# Altium PCB P01-LEDS.PcbDoc (part 1 of 2)
Units mm, origin at the board's own origin, x right, y up, seen from the top; angles counter-clockwise.
Board outline 51.05 x 97.12 mm, 4 copper layers (Top Layer, Mid Layer 1, Mid Layer 2, Bottom Layer), stack 1.57 mm thick; 35 components, 34 nets, 169 pads, 53 vias.
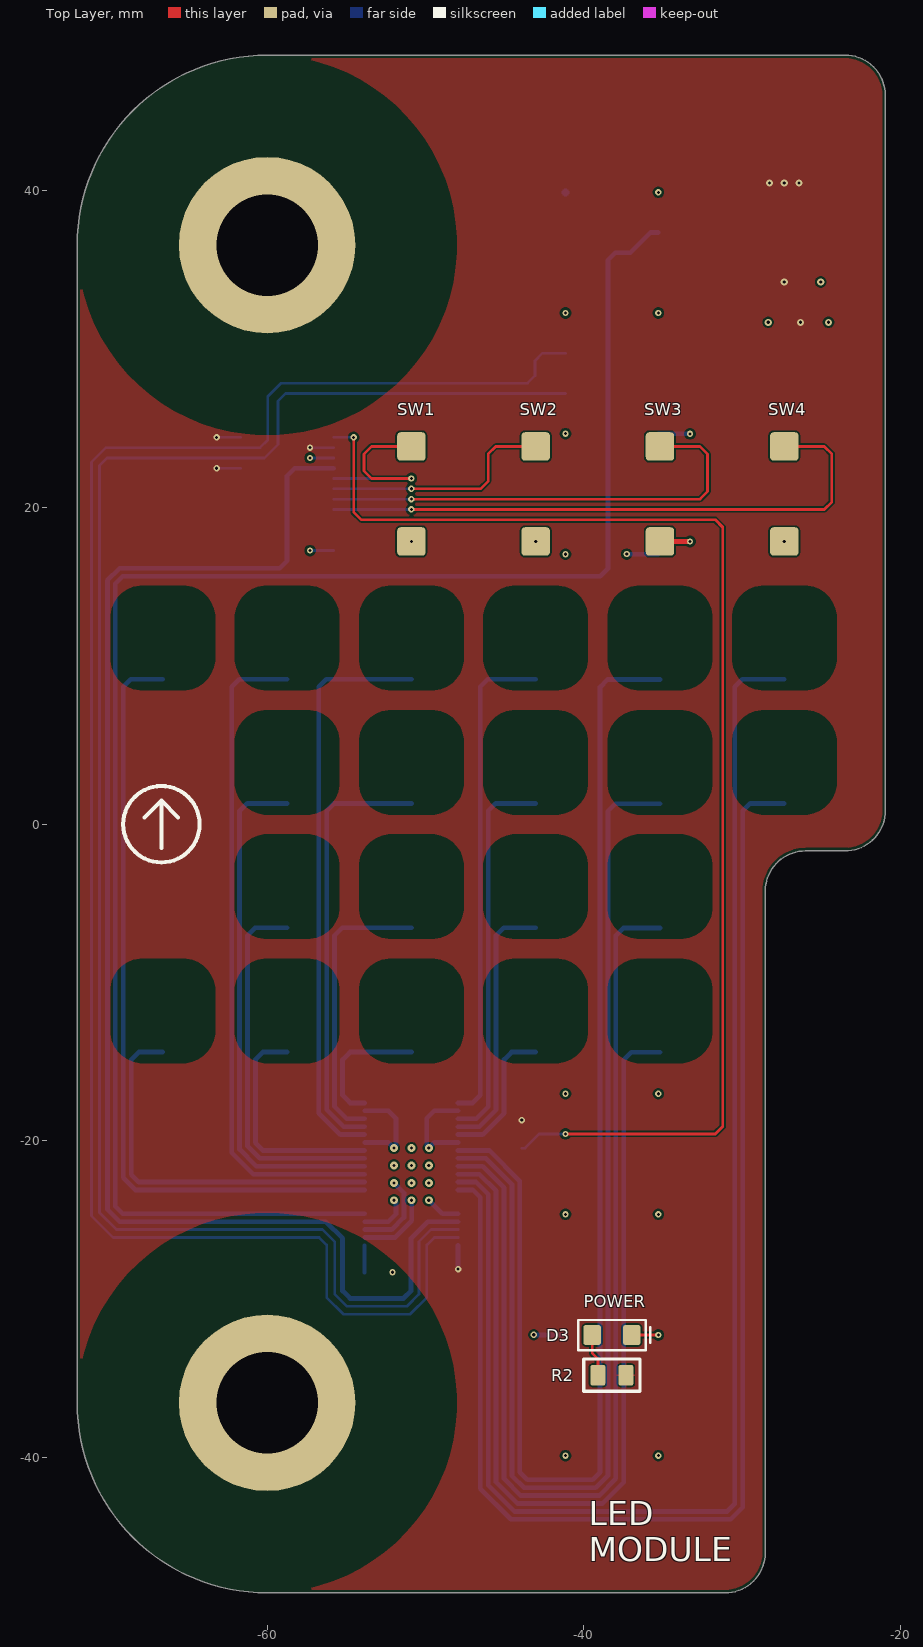
[diagram p0: Top Layer view]
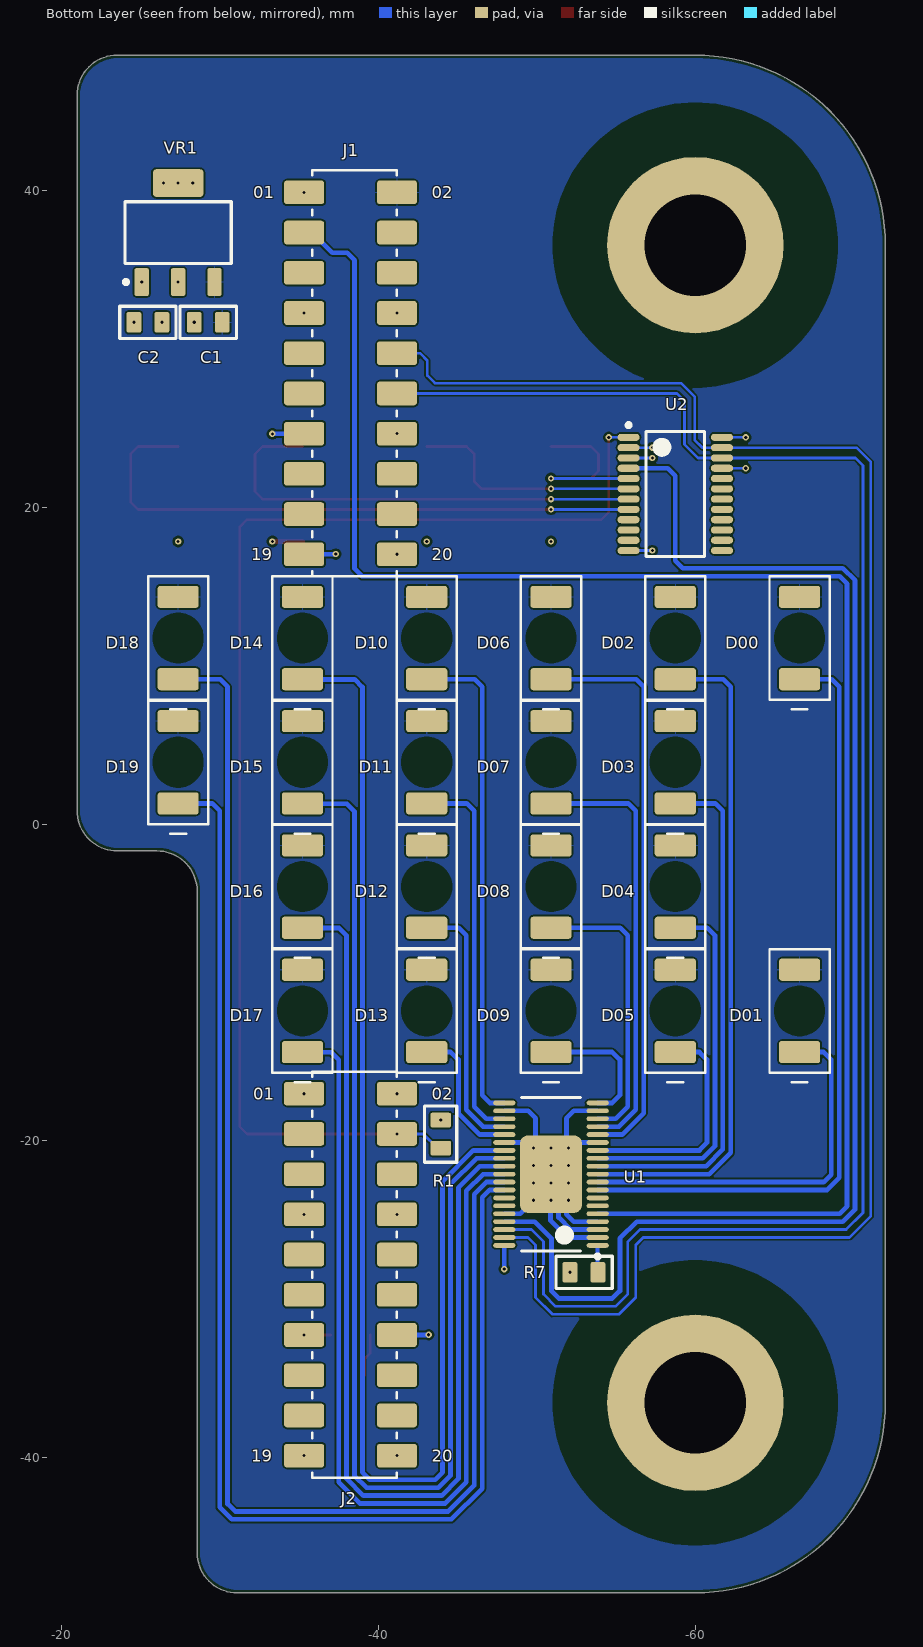
[diagram p1: Bottom Layer view, seen from below]
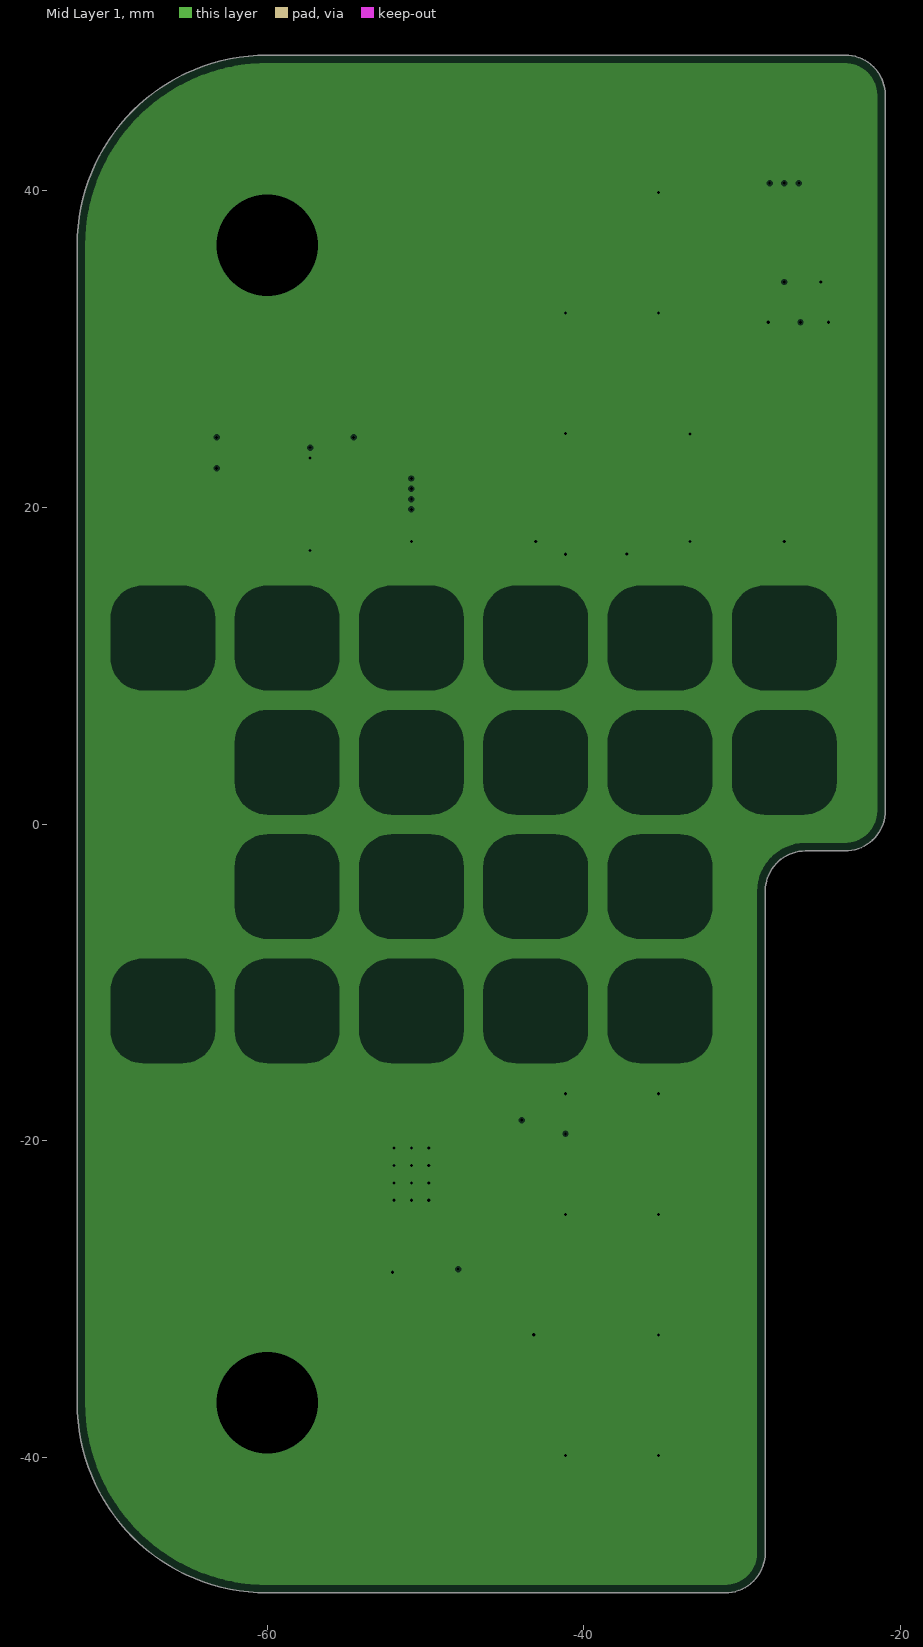
[diagram p2: Mid Layer 1, clearances drawn from the general rule]
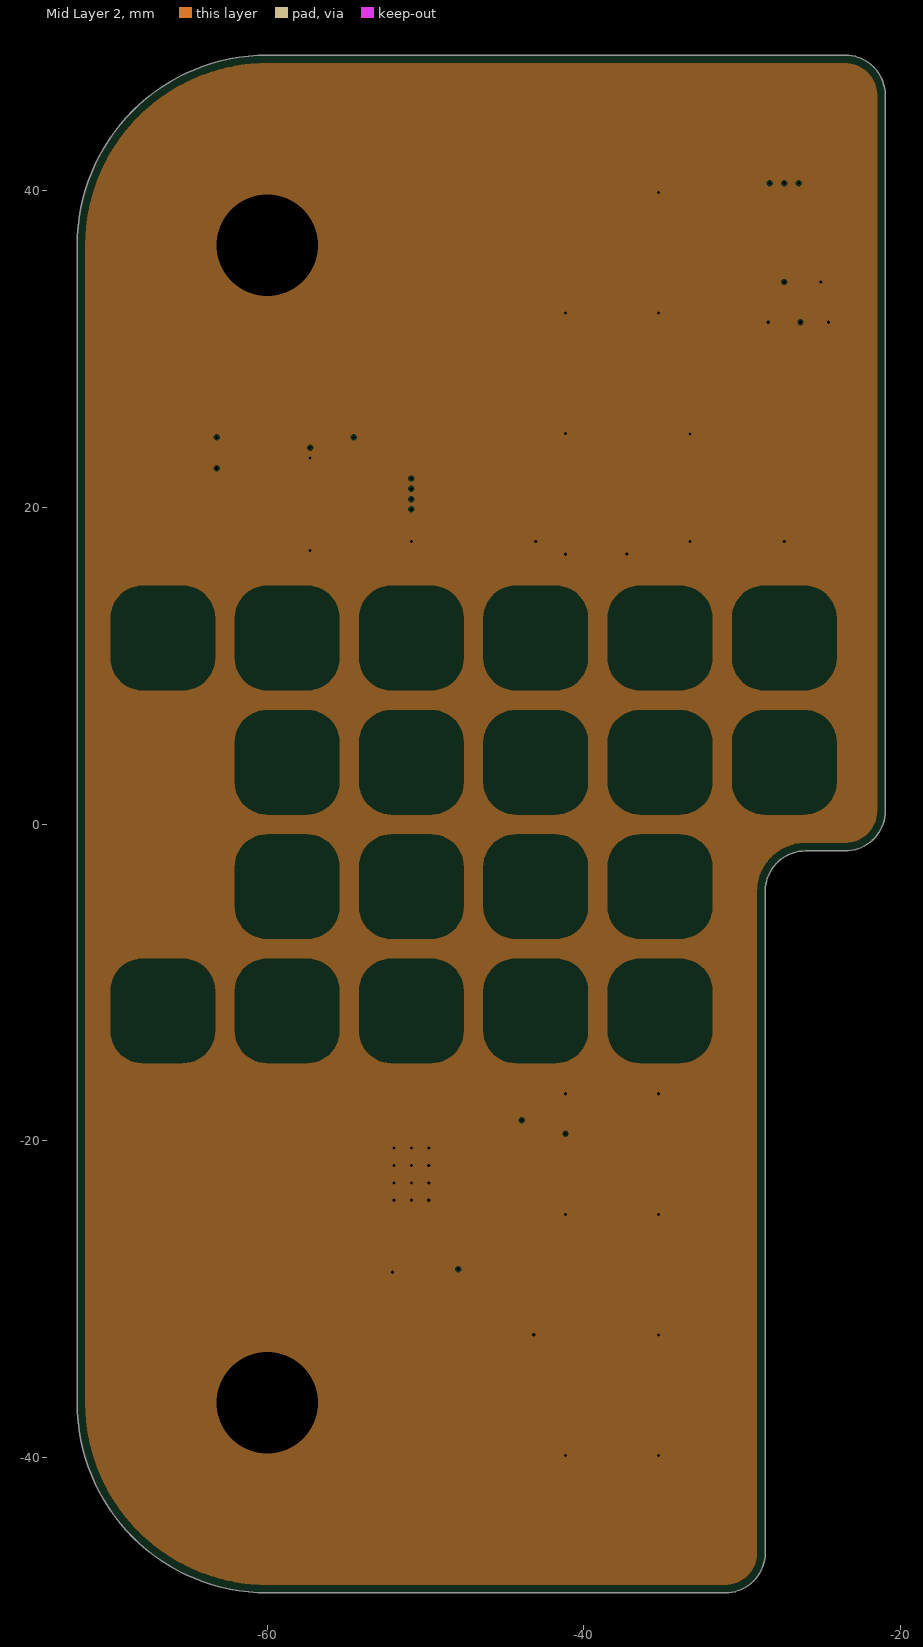
[diagram p3: Mid Layer 2, clearances drawn from the general rule]
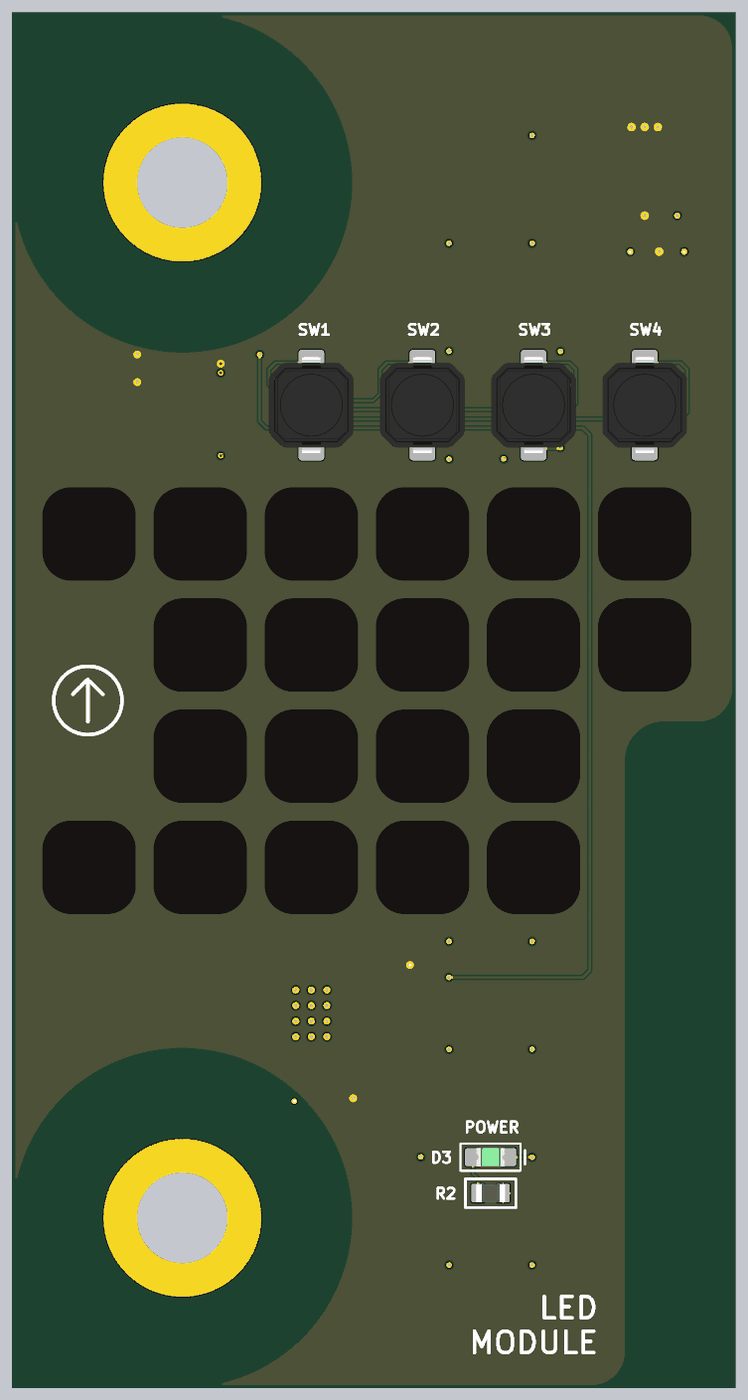
[diagram p4: 3D render of the assembled board from above, using the file's embedded part models]
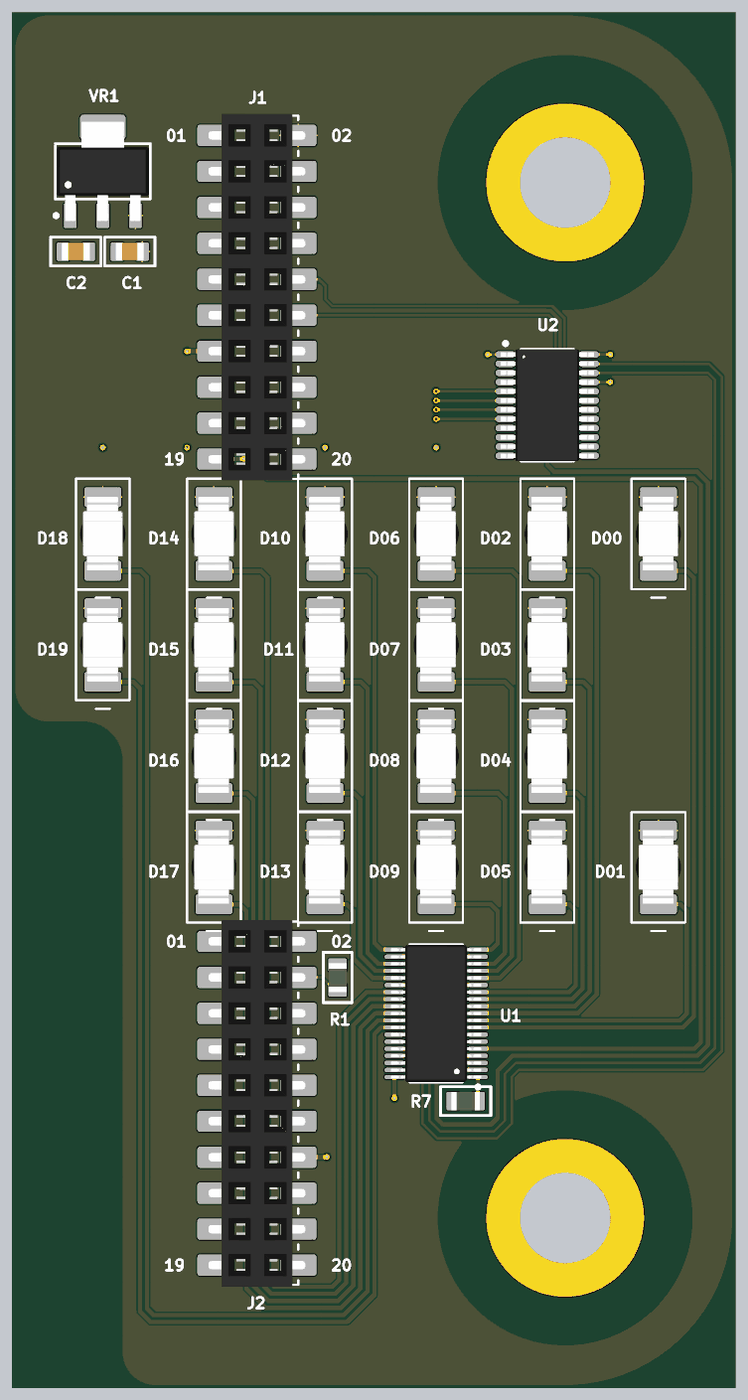
[diagram p5: 3D render of the assembled board from below, using the file's embedded part models]

## Layer stack, top to bottom
Top Solder: solder mask 0.0127, Solder Resist, Dk 3.8
Top Layer: signal copper 0.035
Dielectric 1: prepreg 0.1, 2313, Dk 4.05
Mid Layer 1: plane copper 0.0175, net GND
Core: core 1.265, FR-4, Dk 4.5
Mid Layer 2: plane copper 0.0175, net GND
Dielectric 2: prepreg 0.1, 2313, Dk 4.05
Bottom Layer: signal copper 0.035
Bottom Solder: solder mask 0.0127, Solder Resist, Dk 3.8

## Board outline
-72,-36.561 ccw(c-60,-36.561) -60,-48.562 -31.076,-48.561 ccw(c-31.076,-46.021) -28.536,-46.021 -28.536,-4.238 cw(c-25.996,-4.238) -25.996,-1.699 -23.495,-1.698 ccw(c-23.495,0.841) -20.955,0.841 -20.955,46.022 ccw(c-23.495,46.021) -23.495,48.562 -60,48.562 ccw(c-60,36.562) -72,36.561

## Design rules (kind name [scope] priority, off if disabled: settings)
BoardOutlineClearance [All] p1: gap=0.2 ignorepadtopadclearanceinfootprint=FALSE
Clearance [All] p1: gap=0.102 ignorepadtopadclearanceinfootprint=FALSE except(0.127: Arc-Via Track-Via SMDPad-Via THPad-Via Via-Via Via-Fill Via-Poly Via-Region Via-Text; 0.25: Arc-Hole Track-Hole SMDPad-Hole THPad-Hole Via-Hole Fill-Hole Poly-Hole Region-Hole Text-Hole)
ComponentClearance [All] p1: gap=0.102 collisioncheckmode=3 verticalgap=0.102 showdistances=TRUE
DiffPairsRouting [All] p1: maxlimit=0.102 minlimit=0.102 mostfreqgap=0.102 toplayer_minwidth=0.102 toplayer_maxwidth=1816.048 toplayer_prefwidth=0.102 bottomlayer_minwidth=0.102 bottomlayer_maxwidth=1816.048 bottomlayer_prefwidth=0.102 maxuncoupledlength=12.7
Height [All] p1: minheight=0 maxheight=1816.048 prefheight=12.7
HoleSize [All] p1: absolutevalues=TRUE maxlimit=6.3 minlimit=0.2 maxpercent=80.000 minpercent=20.000
HoleToHoleClearance [All] p1: gap=0.25 allowstackedmicrovias=FALSE
MinimumAnnularRing [All] p1: minimumring=0.076
MinimumSolderMaskSliver [All] p1: minsoldermaskwidth=0
PlaneClearance [All] p1: clearance=0.102
PlaneConnect PlaneConnectPowerPads [InPadClass('PowerPads')] p1: planeconnectstyle=Direct reliefexpansion=0.508 reliefentries=4 reliefconductorwidth=0.254 reliefairgap=0.254
PlaneConnect [All] p2: pad.planeconnectstyle=Relief pad.reliefexpansion=0.3 pad.reliefentries=4 pad.reliefconductorwidth=0.102 pad.reliefairgap=0.102 via.planeconnectstyle=Direct via.reliefexpansion=0.3 via.reliefentries=4 via.reliefconductorwidth=0.127 via.reliefairgap=0.127
PolygonConnect PolygonConnectPowerPads [All vs (InPadClass('PowerPads'))] p1: connectstyle=Direct reliefconductorwidth=0.254 reliefentries=4 polygonreliefangle="90 Angle" airgapwidth=0.254
PolygonConnect [All] p2: thpad.connectstyle=Relief thpad.reliefconductorwidth=0.102 thpad.reliefentries=4 thpad.polygonreliefangle="90 Angle" thpad.airgapwidth=0.102 smdpad.connectstyle=Relief smdpad.reliefconductorwidth=0.102 smdpad.reliefentries=4 smdpad.polygonreliefangle="90 Angle" smdpad.airgapwidth=0.102 via.connectstyle=Direct via.reliefconductorwidth=0.127 via.reliefentries=4 via.polygonreliefangle="90 Angle" via.airgapwidth=0.127
RoutingVias [All] p1: holewidth=0.2 width=0.45 viastyle="Through Hole" minholewidth=0.2 minwidth=0.45 maxholewidth=6.3 maxwidth=6.55
SilkToSilkClearance [All] p1: silktosilkclearance=0
SilkToSolderMaskClearance [IsPad] p1: minsilkscreentomaskgap=0.102 clearancetoexposedcopper=TRUE
SolderMaskExpansion [All] p1: expansion=0.075 istentingtop=FALSE
Width [All] p1: maxlimit=1816.048 minlimit=0.102 preferedwidth=0.102
20 further rules are at their usual default settings.

## Classes and differential pairs
component class S03-LEDS: D00 D01 D02 D03 D04 D05 D06 D07 D08 D09 D10 D11 D12 D13 D14 D15 D16 D17 D18 D19 SW1 SW2 SW3 SW4
component class S02-DRIVER: C1 C2 D3 R2 R7 U1 VR1
component class S01-INTERFACES: J1 J2 R1 U2

## Components (designator, comment, footprint, x,y, rotation, side; value= is the part's Value field where it differs from the comment)
C1 "1.0UF" CL21B105KAFNFNE -29.237,31.685 r180 bottom locked
C2 "1.0UF" CL21B105KAFNFNE -25.427,31.685 r180 bottom locked
D00 "XZFBB45S-9" XZFBB45S-9 -66.586,11.747 r90 bottom locked
D01 "XZFBB45S-9" XZFBB45S-9 -66.586,-11.803 r90 bottom locked
D02 "XZFBB45S-9" XZFBB45S-9 -58.736,11.747 r90 bottom locked
D03 "XZFBB45S-9" XZFBB45S-9 -58.736,3.897 r90 bottom locked
D3 "LTST-C171GKT" LTST-C171GKT -38.223,-32.274 r180 top locked
D04 "XZFBB45S-9" XZFBB45S-9 -58.736,-3.953 r90 bottom locked
D05 "XZFBB45S-9" XZFBB45S-9 -58.736,-11.803 r90 bottom locked
D06 "XZFBB45S-9" XZFBB45S-9 -50.886,11.747 r90 bottom locked
D07 "XZFBB45S-9" XZFBB45S-9 -50.886,3.897 r90 bottom locked
D08 "XZFBB45S-9" XZFBB45S-9 -50.886,-3.953 r90 bottom locked
D09 "XZFBB45S-9" XZFBB45S-9 -50.886,-11.803 r90 bottom locked
D10 "XZFBB45S-9" XZFBB45S-9 -43.036,11.747 r90 bottom locked
D11 "XZFBB45S-9" XZFBB45S-9 -43.036,3.897 r90 bottom locked
D12 "XZFBB45S-9" XZFBB45S-9 -43.036,-3.953 r90 bottom locked
D13 "XZFBB45S-9" XZFBB45S-9 -43.036,-11.803 r90 bottom locked
D14 "XZFBB45S-9" XZFBB45S-9 -35.186,11.747 r90 bottom locked
D15 "XZFBB45S-9" XZFBB45S-9 -35.186,3.897 r90 bottom locked
D16 "XZFBB45S-9" XZFBB45S-9 -35.186,-3.953 r90 bottom locked
D17 "XZFBB45S-9" XZFBB45S-9 -35.186,-11.803 r90 bottom locked
D18 "XZFBB45S-9" XZFBB45S-9 -27.336,11.747 r90 bottom locked
D19 "XZFBB45S-9" XZFBB45S-9 -27.336,3.897 r90 bottom locked
J1 "NPTC102KFMS-RC" NPTC102KFMS-RC -38.223,28.464 r270 bottom locked
J2 "NPTC102KFMS-RC" NPTC102KFMS-RC -38.223,-28.464 r270 bottom locked
R1 "10K0" RC0805FR-0710KL -43.92,-19.586 r90 bottom locked
R2 "330R0" RC0805FR-7W330RL -38.223,-34.814 r0 top locked
R7 "2K87" RC0805FR-0710KL -52.967,-28.314 r180 bottom locked
SW1 "TL9210AF260Q" TL9210AF260Q -50.886,20.844 r270 top locked
SW2 "TL9210AF260Q" TL9210AF260Q -43.036,20.844 r270 top locked
SW3 "TL9210AF260Q" TL9210AF260Q -35.186,20.844 r270 top locked
SW4 "TL9210AF260Q" TL9210AF260Q -27.336,20.844 r270 top locked
U1 "PCA9956BTWY" PCA9956BTWY -50.886,-22.114 r0 bottom locked
U2 "PCA9555PW" PCA9555PW -58.736,20.844 r180 bottom locked
VR1 "TLV1117LV33DCYR" TLV1117LV33DCYR -27.336,37.354 r90 bottom locked

## Footprints (in the part's own frame and the unit in brackets; to place one, negate y for a bottom-side part, rotate by r counter-clockwise, add the part's x,y. Pads: shape width x height; smd on the part's side, far side on the other; paste and mask are expansions set on the pad)
CL21B105KAFNFNE [mm] "CAP CER 1UF 25V X7R 0805"
  rrect25% 0.93x1.3 smd: 1(-0.885,0) 2(0.885,0)
  silkscreen extent -1.77,-1.02 1.78,1.02, body extent -1,-0.62 1,0.63, height 1.35
LTST-C171GKT [mm] "LED GREEN CLEAR CHIP SMD"
  rrect25% 1.1x1.25 smd: A(1.25,0) K(-1.25,0)
  silkscreen extent -2.43,-0.95 2.13,0.95, body extent -1,-0.65 1,0.65, height 0.9
NPTC102KFMS-RC [mm] "CONN HDR 20POS 0.1 TIN SMD"
  rrect25% 1.5x2.54 smd: 1(-11.43,-2.934) 2(-11.43,2.934) 3(-8.89,-2.934) 4(-8.89,2.934) 5(-6.35,-2.934) 6(-6.35,2.934) 7(-3.81,-2.934) 8(-3.81,2.934) 9(-1.27,-2.934) 10(-1.27,2.934) 11(1.27,-2.934) 12(1.27,2.934) 13(3.81,-2.934) 14(3.81,2.934) 15(6.35,-2.934) 16(6.35,2.934) 17(8.89,-2.934) 18(8.89,2.934) 19(11.43,-2.934) 20(11.43,2.934)
  silkscreen extent -12.83,-2.41 12.83,2.92, body extent -12.95,-3.42 12.95,3.42, height 7.5
PCA9555PW [mm] "IC XPND 400KHZ I2C SMBUS 24TSSOP"
  oval 1.4x0.45 smd: 1(-2.95,3.575) 2(-2.95,2.925) 3(-2.95,2.275) 4(-2.95,1.625) 5(-2.95,0.975) 6(-2.95,0.325) 7(-2.95,-0.325) 8(-2.95,-0.975) 9(-2.95,-1.625) 10(-2.95,-2.275) 11(-2.95,-2.925) 12(-2.95,-3.575) 13(2.95,-3.575) 14(2.95,-2.925) 15(2.95,-2.275) 16(2.95,-1.625) 17(2.95,-0.975) 18(2.95,-0.325) 19(2.95,0.325) 20(2.95,0.975) 21(2.95,1.625) 22(2.95,2.275) 23(2.95,2.925) 24(2.95,3.575)
  silkscreen extent -3.08,-3.95 1.85,4.47, body extent -3.3,-3.95 3.3,3.95, height 1.09
PCA9956BTWY [mm] "IC LED DRV LIN PWM 65MA 38HTSSOP"
  oval 1.4x0.3 smd: 1(-2.95,4.5) 2(-2.95,4) 3(-2.95,3.5) 4(-2.95,3) 5(-2.95,2.5) 6(-2.95,2) 7(-2.95,1.5) 8(-2.95,1) 9(-2.95,0.5) 10(-2.95,0) 11(-2.95,-0.5) 12(-2.95,-1) 13(-2.95,-1.5) 14(-2.95,-2) 15(-2.95,-2.5) 16(-2.95,-3) 17(-2.95,-3.5) 18(-2.95,-4) 19(-2.95,-4.5) 20(2.95,-4.5) 21(2.95,-4) 22(2.95,-3.5) 23(2.95,-3) 24(2.95,-2.5) 25(2.95,-2) 26(2.95,-1.5) 27(2.95,-1) 28(2.95,-0.5) 29(2.95,0) 30(2.95,0.5) 31(2.95,1) 32(2.95,1.5) 33(2.95,2) 34(2.95,2.5) 35(2.95,3) 36(2.95,3.5) 37(2.95,4) 38(2.95,4.5)
  rrect25% 3.9x4.9 smd: 39(0,0)
  silkscreen extent -3.07,-4.85 1.85,5.32, body extent -3.2,-4.85 3.2,4.85, height 1.2
RC0805FR-7W330RL [mm] "RES 330 OHM 1% 1/4W 0805"
  rrect25% 0.93x1.3 smd: 1(-0.885,0) 2(0.885,0)
  silkscreen extent -1.77,-1.02 1.78,1.02, body extent -1.02,-0.63 1.02,0.63, height 0.64
RC0805FR-0710KL [mm] "RES 10K OHM 1% 1/8W 0805"
  rrect25% 0.93x1.3 smd: 1(-0.885,0) 2(0.885,0)
  silkscreen extent -1.77,-1.02 1.78,1.02, body extent -1.02,-0.64 1.01,0.63, height 0.64
TL9210AF260Q [mm] "SWITCH TACTILE SPST-NO 0.05A 12V"
  rrect25% 1.8x1.8 smd: 1(-3,0) 2(3,0)
  body extent -3.4,-3 3.4,3, height 5
TLV1117LV33DCYR [mm] "IC REG LINEAR 3.3V 1A SOT223-4"
  rrect25% 1.75x0.9 smd: 1(-3.125,2.3) 2(-3.125,0) 3(-3.125,-2.3)
  rrect25% 1.75x3.2 smd: 2(3.125,0)
  silkscreen extent -3.25,-3.35 1.95,3.43, body extent -3.5,-3.25 3.5,3.25, height 1.8
XZFBB45S-9 [mm] "LED BLUE CLEAR 2PLCC SMD"
  rrect25% 1.4x2.6 smd: A(2.6,0) K(-2.6,0)
  silkscreen extent -4.5,-1.9 3.9,1.9, body extent -2.58,-1.4 2.62,1.4, height 1.87

## Part data
C1 C2: library part CL21B105KAFNFNE, "CAP CER 1UF 25V X7R 0805", Capacitance="1 µF", Operating Temperature="-55°C ~ 125°C", Package / Case="0805 (2012 Metric)", Temperature Coefficient=X7R, Tolerance=±10%, Voltage - Rated=25V, Applications="General Purpose", Mounting Type="Surface Mount, MLCC", Size / Dimension="0.079\" L x 0.049\" W (2.00mm x 1.25mm)", Supplier 1="Arrow Electronics", Supplier Part Number 1=CL21B105KAFNFNE, Thickness (Max)="0.053\" (1.35mm)"
D00 D01 D02 D03 D04 D05 D06 D07 D08 D09 D10 D11 D12 D13 D14 D15 D16 D17 D18 D19: "LED BLUE CLEAR 2PLCC SMD", Color=Blue, Current - Test=20mA, Lens Color=Colorless, Millicandela Rating=447mcd, Package / Case="2-SMD, Z-Bend", Supplier Device Package=2-PLCC, Supplier Part Number 1=1497-1233-1-ND, Voltage - Forward (Vf) (Typ)=3.3V, Configuration=Standard, Height (Max)=1.90mm, Lens Size="2.40mm Dia", Lens Style="Round with Flat Top", Lens Transparency=Clear, Mounting Type="Surface Mount, Bottom Entry", Size / Dimension="3.20mm L x 2.80mm W", Supplier 1=Digi-Key, Viewing Angle=120°, Wavelength - Dominant=470nm, Wavelength - Peak=465nm
D3: "LED GREEN CLEAR CHIP SMD", Color=Green, Current - Test=20mA, Lens Color=Colorless, Millicandela Rating=12mcd, Package / Case="0805 (2012 Metric)", Supplier Device Package="Chip LED", Supplier Part Number 1=160-1423-1-ND, Voltage - Forward (Vf) (Typ)=2.1V, Configuration=Standard, Height (Max)=0.90mm, Lens Size="1.40mm x 1.25mm", Lens Style="Rectangle with Flat Top", Lens Transparency=Clear, Mounting Type="Surface Mount", Size / Dimension="2.00mm L x 1.25mm W", Supplier 1=Digi-Key, Viewing Angle=130°, Wavelength - Dominant=569nm, Wavelength - Peak=565nm
J1 J2: "CONN HDR 20POS 0.1 TIN SMD", Current Rating (Amps)=3A, Insulation Color=Black, Material Flammability Rating="UL94 V-0", Operating Temperature="-40°C ~ 125°C", Supplier Part Number 1=S5680-ND, Voltage Rating=250V, Connector Type=Header, Contact Finish - Mating=Tin, Contact Finish - Post=Tin, Contact Material="Phosphor Bronze", Contact Shape=Square, Contact Type="Female Socket", Fastening Type=Push-Pull, Insulation Height="0.299\" (7.60mm)", Insulation Material="Polyamide (PA6T), Nylon 6T", Mounting Type="Surface Mount", Number of Positions=20, Number of Positions Loaded=All, Number of Rows=2, Pitch - Mating="0.100\" (2.54mm)", Row Spacing - Mating="0.100\" (2.54mm)", Style="Board to Board", Supplier 1=Digi-Key, System=Connector, Termination=Solder
R1: library part RC0805FR-0710KL, "RES 10K OHM 1% 1/8W 0805", Operating Temperature="-55°C ~ 155°C", Package / Case="0805 (2012 Metric)", Power (Watts)="0.125W, 1/8W", Resistance="10 kOhms", Supplier Device Package=0805, Supplier Part Number 1=3310877, Temperature Coefficient=±100ppm/°C, Tolerance=±1%, Composition="Thick Film", Features="Moisture Resistant", Height - Seated (Max)="0.024\" (0.60mm)", Number of Terminations=2, Size / Dimension="0.079\" L x 0.049\" W (2.00mm x 1.25mm)", Supplier 1="Future Electronics"
R2: library part RC0805FR-7W330RL, "RES 330 OHM 1% 1/4W 0805", Operating Temperature="-55°C ~ 155°C", Power (Watts)="0.25W, 1/4W", Resistance="330 Ohms", Supplier Device Package=0805, Supplier Part Number 1=603-RC0805FR-7W330RL, Temperature Coefficient=±100ppm/°C, Tolerance=±1%, Composition="Thick Film", Features="Moisture Resistant", Height - Seated (Max)="0.024\" (0.60mm)", Number of Terminations=2, Size / Dimension="0.079\" L x 0.049\" W (2.00mm x 1.25mm)", Supplier 1=Mouser
R7: library part RC0805FR-072K87L, "RES 2.87K OHM 1% 1/8W 0805", Operating Temperature="-55°C ~ 155°C", Package / Case="0805 (2012 Metric)", Power (Watts)="0.125W, 1/8W", Resistance="2.87 kOhms", Supplier Device Package=0805, Supplier Part Number 1=1021979, Temperature Coefficient=±100ppm/°C, Tolerance=±1%, Composition="Thick Film", Features="Moisture Resistant", Height - Seated (Max)="0.024\" (0.60mm)", Number of Terminations=2, Size / Dimension="0.079\" L x 0.049\" W (2.00mm x 1.25mm)", Supplier 1="Future Electronics"
SW1 SW2 SW3 SW4: "SWITCH TACTILE SPST-NO 0.05A 12V", Contact Rating @ Voltage="0.05A @ 12VDC", Operating Force=260gf, Operating Temperature="-20°C ~ 70°C", Supplier Part Number 1=EG2664CT-ND, Actuator Height off PCB, Vertical=5.00mm, Actuator Orientation="Top Actuated", Actuator Type="Round Button", Circuit=SPST-NO, Illumination=Non-Illuminated, Mechanical Life="100,000 Cycles", Mounting Type="Surface Mount", Outline="6.00mm x 6.00mm", Supplier 1=Digi-Key, Switch Function=Off-Mom, Switch Travel=1.30mm, Termination Style="J Lead"
U1: "IC LED DRV LIN PWM 65MA 38HTSSOP", Current - Output / Channel=65mA, Operating Temperature="-40°C ~ 85°C (TA)", Package / Case="38-TFSOP (0.173\", 4.40mm Width) Exposed Pad", Supplier Device Package=38-HTSSOP, Voltage - Supply (Max)=5.5V, Voltage - Supply (Min)=3V, Applications=Backlight, Dimming=PWM, Internal Switch(s)=Yes, Mounting Type="Surface Mount", Number of Outputs=24, Supplier 1="Arrow Electronics", Supplier Part Number 1=PCA9956BTWY, Type=Linear
U2: "IC XPND 400KHZ I2C SMBUS 24TSSOP", Clock Frequency="400 kHz", Current - Output Source/Sink="10mA, 25mA", Operating Temperature="-40°C ~ 85°C", Package / Case="24-TSSOP (0.173\", 4.40mm Width)", Supplier Device Package=24-TSSOP, Supplier Part Number 1=24AC9600, Voltage - Supply="2.3V ~ 5.5V", Features=POR, Interface="I²C, SMBus", Interrupt Output=Yes, Mounting Type="Surface Mount", Number of I/O=16, Output Type=Push-Pull, Supplier 1=Newark
VR1: "IC REG LINEAR 3.3V 1A SOT223-4", Current - Output=1A, Current - Quiescent (Iq)="100 µA", Operating Temperature="-40°C ~ 125°C", Package / Case="TO-261-4, TO-261AA", Supplier Part Number 1=296-28778-1-ND, Voltage - Input (Max)=5.5V, Voltage - Output (Min/Fixed)=3.3V, Voltage Dropout (Max)="1.3V @ 800mA", ComponentLink1Description=Datasheet, ComponentLink1URL=https://www.ti.com/lit/ds/symlink/tlv1117lv.pdf, Mounting Type="Surface Mount", Number of Regulators=1, Output Configuration=Positive, Output Type=Fixed, Protection Features="Over Current, Over Temperature", PSRR="75dB (120Hz)", Supplier 1=Digi-Key

## Free pads (board coordinates)
  round 11.14 hole 6.4: M(-60,-36.561) M(-60,36.561)

## Via types
v1: diameter 0.4, hole 0.2, Top Layer to Bottom Layer, 33 vias
v2: diameter 0.5, hole 0.2, Top Layer to Bottom Layer, 12 vias
v3: diameter 0.45, hole 0.2, Top Layer to Bottom Layer, 8 vias

## Nets (pads, with @x,y where several pads share a name; then routed paths per layer and width w, separated by ;. In a path a pad name is that pad's centre, name@x,y a point inside that pad or via, vN(x,y) a via of type N, cw(c..) or ccw(c..) an arc to the next point about the centre after c; other vN are vias at no path point)
+3V3: C2.2 R1.2 R2.2 U1.38 U2.2 U2.21 U2.24 VR1.2 | length 6
  Bottom Layer w0.171: v1(-63.186,22.469) U2.21 ; v1(-63.186,24.419) U2.24 ; v1(-57.286,23.769) U2.2
  Bottom Layer w0.3: v1(-47.936,-28.114) U1.38
  other v1: -43.92,-18.701
  other v3: -26.312,31.685 -27.336,34.229 -28.261,40.479 -27.336,40.479 -26.411,40.479
+5V0: C1.2 D00.A D01.A D02.A D03.A D04.A D05.A D06.A D07.A D08.A D09.A D10.A D11.A D12.A D13.A D14.A D15.A D16.A D17.A D18.A D19.A J1.2 VR1.3 | length 0
\LED_GPIOINT: J2.4 R1.1 U2.1 | length 80.8
  Top Layer w0.171: v1(-54.536,24.419) -54.536,19.694 -54.061,19.219 -31.698,19.219 -31.223,18.744 -31.223,-19.099 -31.698,-19.574 v1(-41.157,-19.574)
  Bottom Layer w0.171: U2.1 v1(-54.536,24.419) v1@-54.486,24.419 ; R1.1 -43.712,-20.471 -42.815,-19.574 v1(-41.157,-19.574)
\LED_OE: J1.3 U1.5 | length 110.2
  Bottom Layer w0.3: U1.5 -69.111,-24.614 -69.586,-24.139 -69.586,11.406 -69.586,15.172 -69.111,15.647 -38.952,15.647 -38.477,16.122 -38.477,35.609 -38.002,36.084 -37.068,36.084 -35.798,37.354 J1.3
\LED_RST: U1.35 U2.4 | length 91.6
  Bottom Layer w0.3: U2.4 -58.261,22.469 -58.736,21.994 -58.736,16.622 -59.211,16.147 -69.318,16.147 ; U1.35 -49.85,-25.114 -50.911,-26.175 -50.911,-29.489 -51.386,-29.964 -54.761,-29.964 -55.236,-29.489 -55.236,-26.175 -56.297,-25.114 -69.318,-25.114 -70.086,-24.346 -70.086,13.308 -70.086,15.379 ; -70.086,15.379 -69.318,16.147 ; -70.086,15.379 -69.318,16.147
\TACTILE_A: SW1.1 U2.5 | length 13.7
  Top Layer w0.171: v1(-50.886,21.819) -53.411,21.819 ; SW1.1 -53.411,23.844 ; -53.886,22.294 -53.411,21.819 ; -53.886,22.294 -53.886,23.369 ; -53.886,22.294 -53.411,21.819 ; -53.886,23.369 -53.411,23.844 ; -53.886,23.369 -53.411,23.844
  Bottom Layer w0.171: U2.5 v1(-50.886,21.819)
\TACTILE_B: SW2.1 U2.6 | length 16.2
  Top Layer w0.171: v1(-50.886,21.169) -46.511,21.169 ; SW2.1 -45.561,23.844 ; -46.511,21.169 -46.036,21.644 ; -46.511,21.169 -46.036,21.644 ; -46.036,21.644 -46.036,23.369 ; -46.036,23.369 -45.561,23.844 ; -46.036,23.369 -45.561,23.844
  Bottom Layer w0.171: U2.6 v1(-50.886,21.169)
\TACTILE_C: SW3.1 U2.7 | length 30.7
  Top Layer w0.171: v1(-50.886,20.519) -32.661,20.519 ; SW3.1 -32.661,23.844 ; -32.661,20.519 -32.186,20.994 ; -32.661,20.519 -32.186,20.994 ; -32.661,23.844 -32.186,23.369 ; -32.661,23.844 -32.186,23.369 ; -32.186,20.994 -32.186,23.369
  Bottom Layer w0.171: U2.7 v1(-50.886,20.519)
\TACTILE_D: SW4.1 U2.8 | length 39.2
  Top Layer w0.171: v1(-50.886,19.869) -24.811,19.869 ; SW4.1 -24.811,23.844 ; -24.811,19.869 -24.336,20.344 ; -24.811,19.869 -24.336,20.344 ; -24.811,23.844 -24.336,23.369 ; -24.811,23.844 -24.336,23.369 ; -24.336,20.344 -24.336,23.369
  Bottom Layer w0.171: U2.8 v1(-50.886,19.869)
GND: C1.1 C2.1 D3.K J1.1 J1.7 J1.8 J1.13 J1.14 J1.19 J1.20 J2.1 J2.2 J2.7 J2.8 J2.13 J2.14 J2.19 J2.20 pad.M R7.1 SW1.2 SW2.2 SW3.2 SW4.2 U1.2 U1.3 U1.4 U1.14 U1.18 U1.21 U1.25 U1.34 U1.39 U2.3 U2.12 VR1.1 | length 40
  Top Layer w0.171: D3.K v1(-35.289,-32.274)
  Top Layer w0.3: SW3.2 v1(-33.289,17.844)
  Bottom Layer w0.171: v1(-57.286,17.269) U2.12 ; v1(-57.286,23.119) U2.3
  Bottom Layer w0.3: U1.2 -51.922,-26.114 -50.861,-25.053 -50.861,-23.789 v2(-50.886,-23.764) ; U1.3 -52.129,-25.614 -51.361,-24.846 -51.361,-23.289 v2(-51.986,-22.664) ; U1.4 -52.336,-25.114 -51.861,-24.639 -51.861,-23.889 v2(-51.986,-23.764) ; U1.14 -52.336,-20.114 v2(-51.986,-20.464) -51.861,-20.339 -51.861,-18.589 -52.336,-18.114 U1.18 ; v2(-49.786,-23.764) -48.936,-24.614 U1.34 ; U1.25 -49.436,-20.114 v2(-49.786,-20.464) -49.911,-20.339 -49.911,-18.589 -49.436,-18.114 U1.21 ; v1@-43.157,-32.274 J2.14 ; v1@-37.29,17.034 J1.19 ; J1.13 v1@-33.289,24.654
  other v1: -41.157,-39.894 -35.289,-39.894 -43.157,-32.258 -52.082,-28.314 -41.157,-24.654 -35.289,-24.654 -41.157,-17.034 -35.289,-17.034 -41.157,17.034 -37.29,17.05 -50.886,17.844 -43.036,17.844 -27.336,17.844 -33.289,24.638 -41.157,24.654 -41.157,32.274 -35.289,32.274 -35.289,39.894
  other v2: -50.886,-22.664 -49.786,-22.664 -51.986,-21.564 -50.886,-21.564 -49.786,-21.564 -50.886,-20.464
  other v3: -28.352,31.685 -24.542,31.685 -25.036,34.229
I2CBUS_A_SCL: J1.12 U1.36 U2.22 | length 111.1
  Bottom Layer w0.171: -69.525,-25.614 -70.586,-24.553 -70.586,14.224 -70.586,22.644 -70.111,23.119 U2.22 -60.167,23.119 -59.311,23.975 -59.311,26.719 -58.836,27.194 J1.12 ; -69.525,-25.614 -56.504,-25.614 -55.736,-26.382 -55.736,-29.696 -54.968,-30.464 -51.179,-30.464 -50.411,-29.696 -50.411,-26.382 -49.643,-25.614 U1.36
I2CBUS_A_SDA: J1.10 U1.37 U2.23 | length 114.1
  Bottom Layer w0.171: -69.732,-26.114 -71.086,-24.76 -71.086,14.224 -71.086,22.851 -70.168,23.769 U2.23 -60.436,23.769 -59.961,24.244 -59.961,26.988 -59.105,27.844 -43.552,27.844 -43.077,28.319 -43.077,29.259 -42.602,29.734 J1.10 ; -69.704,-26.114 -56.711,-26.114 -56.236,-26.589 -56.236,-29.903 -55.175,-30.964 -50.972,-30.964 -49.911,-29.903 -49.911,-26.589 -49.436,-26.114 U1.37
LED_K_D00: D00.K U1.8 | length 50
  Bottom Layer w0.3: D00.K -68.611,9.147 ; U1.8 -68.318,-23.114 -69.086,-22.346 -69.086,8.672 ; -69.086,8.672 -68.611,9.147 ; -69.086,8.672 -68.611,9.147
LED_K_D01: D01.K U1.9 | length 25.1
  Bottom Layer w0.3: D01.K -68.111,-14.403 -68.586,-14.878 -68.586,-22.139 ; U1.9 -68.111,-22.614 ; -68.586,-22.139 -68.111,-22.614 ; -68.586,-22.139 -68.111,-22.614
LED_K_D02: D02.K U1.10 | length 44.7
  Bottom Layer w0.3: D02.K -61.761,9.147 ; U1.10 -60.882,-22.114 ; -62.236,-20.76 -62.236,8.672 ; -62.236,-20.76 -60.882,-22.114 ; -62.236,-20.76 -60.882,-22.114 ; -62.236,8.672 -61.761,9.147 ; -62.236,8.672 -61.761,9.147
LED_K_D03: D03.K U1.11 | length 33.6
  Bottom Layer w0.3: D03.K -61.261,1.297 ; U1.11 -60.675,-21.614 -61.736,-20.553 -61.736,0.822 ; -61.736,0.822 -61.261,1.297 ; -61.736,0.822 -61.261,1.297
LED_K_D04: D04.K U1.12 | length 24.4
  Bottom Layer w0.3: D04.K -60.761,-6.553 ; U1.12 -60.468,-21.114 -61.236,-20.346 -61.236,-7.028 ; -61.236,-7.028 -60.761,-6.553 ; -61.236,-7.028 -60.761,-6.553
LED_K_D05: D05.K U1.13 | length 15.2
  Bottom Layer w0.3: D05.K -60.261,-14.403 -60.736,-14.878 -60.736,-20.139 ; U1.13 -60.261,-20.614 ; -60.736,-20.139 -60.261,-20.614 ; -60.736,-20.139 -60.261,-20.614
LED_K_D06: D06.K U1.15 | length 37.1
  Bottom Layer w0.3: U1.15 -55.382,-19.614 -56.736,-18.26 -56.736,8.672 ; D06.K -56.261,9.147 ; -56.736,8.672 -56.261,9.147 ; -56.736,8.672 -56.261,9.147
LED_K_D07: D07.K U1.16 | length 27.9
  Bottom Layer w0.3: U1.16 -55.175,-19.114 -56.236,-18.053 -56.236,0.822 ; D07.K -55.761,1.297 ; -56.236,0.822 -55.761,1.297 ; -56.236,0.822 -55.761,1.297
LED_K_D08: D08.K U1.17 | length 18.8
  Bottom Layer w0.3: U1.17 -54.968,-18.614 -55.736,-17.846 -55.736,-7.028 ; D08.K -55.261,-6.553 ; -55.736,-7.028 -55.261,-6.553 ; -55.736,-7.028 -55.261,-6.553
LED_K_D09: D09.K U1.19 | length 9.1
  Bottom Layer w0.3: U1.19 -54.761,-17.614 -55.236,-17.139 -55.236,-14.878 ; D09.K -54.761,-14.403 ; -55.236,-14.878 -54.761,-14.403 ; -55.236,-14.878 -54.761,-14.403
LED_K_D10: D10.K U1.20 | length 32.4
  Bottom Layer w0.3: U1.20 -47.011,-17.614 ; D10.K -46.061,9.147 ; -47.011,-17.614 -46.536,-17.139 ; -47.011,-17.614 -46.536,-17.139 ; -46.536,-17.139 -46.536,8.672 ; -46.536,8.672 -46.061,9.147 ; -46.536,8.672 -46.061,9.147
LED_K_D11: D11.K U1.22 | length 24.8
  Bottom Layer w0.3: U1.22 -46.804,-18.614 -46.036,-17.846 -46.036,0.822 ; D11.K -45.561,1.297 ; -46.036,0.822 -45.561,1.297 ; -46.036,0.822 -45.561,1.297
LED_K_D12: D12.K U1.23 | length 17.2
  Bottom Layer w0.3: U1.23 -46.597,-19.114 -45.536,-18.053 -45.536,-7.028 ; D12.K -45.061,-6.553 ; -45.536,-7.028 -45.061,-6.553 ; -45.536,-7.028 -45.061,-6.553
LED_K_D13: D13.K U1.24 | length 9
  Bottom Layer w0.3: U1.24 -46.39,-19.614 -45.036,-18.26 -45.036,-14.878 -44.561,-14.403 D13.K
LED_K_D14: D14.K U1.26 | length 83.5
  Bottom Layer w0.3: U1.26 -45.975,-20.614 -44.036,-22.553 -44.036,-40.943 ; D14.K@-35.186,9.127 -38.498,9.127 ; -44.036,-40.943 -43.561,-41.418 ; -44.036,-40.943 -43.561,-41.418 ; -43.561,-41.418 -39.448,-41.418 -38.973,-40.943 -38.973,-37.683 -38.973,7.688 -38.973,8.652 ; -38.973,8.652 -38.498,9.127 ; -38.973,8.652 -38.498,9.127
LED_K_D15: D15.K U1.27 | length 75.3
  Bottom Layer w0.3: U1.27 -46.183,-21.114 -44.536,-22.761 -44.536,-41.15 -43.768,-41.918 -39.238,-41.918 -38.471,-41.15 ; -38.473,-41.153 -38.473,-41.15 -38.473,-37.503 -38.473,-1.075 -38.473,0.802 ; D15.K@-35.186,1.277 -37.998,1.277 ; -38.473,0.802 -37.998,1.277 ; -38.473,0.802 -37.998,1.277
LED_K_D16: D16.K U1.28 | length 70.8
  Bottom Layer w0.3: U1.28 -46.39,-21.614 -45.036,-22.968 -45.036,-41.357 ; D16.K@-35.186,-6.573 -37.498,-6.573 ; -45.036,-41.357 -43.975,-42.418 ; -45.036,-41.357 -43.975,-42.418 ; -43.975,-42.418 -39.034,-42.418 ; -39.034,-42.418 -37.973,-41.357 ; -39.034,-42.418 -37.973,-41.357 ; -37.973,-41.357 -37.973,-38.291 -37.973,-8.17 -37.973,-7.048 ; -37.973,-7.048 -37.498,-6.573 ; -37.973,-7.048 -37.498,-6.573
LED_K_D17: D17.K U1.29 | length 60.2
  Bottom Layer w0.3: U1.29 -46.597,-22.114 -45.536,-23.175 -45.536,-41.564 -44.182,-42.918 -38.827,-42.918 -37.473,-41.564 -37.473,-14.898 ; D17.K@-35.186,-14.423 -36.998,-14.423 ; -37.473,-14.898 -36.998,-14.423 ; -37.473,-14.898 -36.998,-14.423
LED_K_D18: D18.K U1.30 | length 95
  Bottom Layer w0.3: U1.30 -46.804,-22.614 -46.036,-23.382 -46.036,-41.771 ; D18.K -29.986,9.147 ; -46.036,-41.771 -44.389,-43.418 ; -46.036,-41.771 -44.389,-43.418 ; -44.389,-43.418 -30.936,-43.418 -30.461,-42.943 -30.461,-37.954 -30.461,-1.514 -30.461,8.672 ; -30.461,8.672 -29.986,9.147 ; -30.461,8.672 -29.986,9.147
LED_K_D19: D19.K U1.31 | length 88.3
  Bottom Layer w0.3: U1.31 -47.011,-23.114 -46.536,-23.589 -46.536,-41.979 ; D19.K -29.486,1.297 -29.961,0.822 -29.961,-4.523 -29.961,-38.343 -29.961,-43.15 ; -46.536,-41.979 -44.597,-43.918 ; -46.536,-41.979 -44.597,-43.918 ; -44.597,-43.918 -30.729,-43.918 ; -30.729,-43.918 -29.961,-43.15 ; -30.729,-43.918 -29.961,-43.15
NetD3_A: D3.A R2.1 | length 2.7
  Top Layer w0.171: D3.A -39.473,-33.417 -39.108,-33.782 R2.1
NetR7_2: R7.2 U1.1 | length 1.7
  Bottom Layer w0.254: R7.2@-53.836,-28.314 U1.1
pads on no net: J1.4 J1.5 J1.6 J1.9 J1.11 J1.15 J1.16 J1.17 J1.18 J2.3 J2.5 J2.6 J2.9 J2.10 J2.11 J2.12 J2.15 J2.16 J2.17 J2.18 U1.6 U1.7 U1.32 U1.33 U2.9 U2.10 U2.11 U2.13 U2.14 U2.15 U2.16 U2.17 U2.18 U2.19 U2.20

## Polygon pours and split planes (outlines as drawn)
+5V0 on Bottom Layer "Bottom Polygon" (solid, remove dead copper, pour order 0): -72,-36.561 ccw(c-60,-36.561) -60,-48.562 -31.076,-48.561 ccw(c-31.076,-46.021) -28.536,-46.021 -28.536,-4.238 cw(c-25.996,-4.239) -25.996,-1.699 -23.495,-1.698 ccw(c-23.495,0.841) -20.955,0.841 -20.955,46.022 ccw(c-23.495,46.022) -23.495,48.562 -60,48.561 ccw(c-60,36.562) -72,36.561
+3V3 on Top Layer "Top Polygon" (solid, remove dead copper, pour order 1): -72,-36.561 ccw(c-60,-36.561) -60,-48.562 -31.076,-48.561 ccw(c-31.076,-46.021) -28.536,-46.021 -28.536,-4.238 cw(c-25.996,-4.239) -25.996,-1.699 -23.495,-1.698 ccw(c-23.495,0.841) -20.955,0.841 -20.955,46.022 ccw(c-23.495,46.022) -23.495,48.562 -60,48.561 ccw(c-60,36.562) -72,36.561
GND on Mid Layer 2 (split plane): 180 vertices, not listed, extent -71.492,-48.053 -21.464,48.053
GND on Mid Layer 1 (split plane): 180 vertices, not listed, extent -71.492,-48.053 -21.464,48.053

## Other copper
Top Layer:
  pour cut-out: -60,24.561 cw(c-60,36.561) -72,36.561 cw(c-60,36.561) -60,48.562 cw(c-60,36.561) -48,36.561 cw(c-60,36.561)
  pour cut-out: -72,-36.561 ccw(c-60,-36.561) -60,-48.562 ccw(c-60,-36.561) -48,-36.561 ccw(c-60,-36.561) -60,-24.561 ccw(c-60,-36.561)
  pour cut-out: -47.586,10.479 -47.586,13.015 ccw(c-49.618,13.015) -49.618,15.047 -52.154,15.047 ccw(c-52.154,13.015) -54.186,13.015 -54.186,10.479 ccw(c-52.154,10.479) -52.154,8.447 -49.618,8.447 ccw(c-49.618,10.479)
  pour cut-out: -62.036,-5.221 -62.036,-2.685 cw(c-60.004,-2.685) -60.004,-0.653 -57.468,-0.653 cw(c-57.468,-2.685) -55.436,-2.685 -55.436,-5.221 cw(c-57.468,-5.221) -57.468,-7.253 -60.004,-7.253 cw(c-60.004,-5.221)
  pour cut-out: -46.336,10.479 -46.336,13.015 cw(c-44.304,13.015) -44.304,15.047 -41.768,15.047 cw(c-41.768,13.015) -39.736,13.015 -39.736,10.479 cw(c-41.768,10.479) -41.768,8.447 -44.304,8.447 cw(c-44.304,10.479)
  pour cut-out: -62.036,10.479 -62.036,13.015 cw(c-60.004,13.015) -60.004,15.047 -57.468,15.047 cw(c-57.468,13.015) -55.436,13.015 -55.436,10.479 cw(c-57.468,10.479) -57.468,8.447 -60.004,8.447 cw(c-60.004,10.479)
  pour cut-out: -63.286,10.479 -63.286,13.015 ccw(c-65.318,13.015) -65.318,15.047 -67.854,15.047 ccw(c-67.854,13.015) -69.886,13.015 -69.886,10.479 ccw(c-67.854,10.479) -67.854,8.447 -65.318,8.447 ccw(c-65.318,10.479)
  pour cut-out: -46.336,-5.221 -46.336,-2.685 cw(c-44.304,-2.685) -44.304,-0.653 -41.768,-0.653 cw(c-41.768,-2.685) -39.736,-2.685 -39.736,-5.221 cw(c-41.768,-5.221) -41.768,-7.253 -44.304,-7.253 cw(c-44.304,-5.221)
  pour cut-out: -30.636,10.479 -30.636,13.015 cw(c-28.604,13.015) -28.604,15.047 -26.068,15.047 cw(c-26.068,13.015) -24.036,13.015 -24.036,10.479 cw(c-26.068,10.479) -26.068,8.447 -28.604,8.447 cw(c-28.604,10.479)
  pour cut-out: -54.186,-13.071 -54.186,-10.535 cw(c-52.154,-10.535) -52.154,-8.503 -49.618,-8.503 cw(c-49.618,-10.535) -47.586,-10.535 -47.586,-13.071 cw(c-49.618,-13.071) -49.618,-15.103 -52.154,-15.103 cw(c-52.154,-13.071)
  pour cut-out: -39.736,-13.071 -39.736,-10.535 ccw(c-41.768,-10.535) -41.768,-8.503 -44.304,-8.503 ccw(c-44.304,-10.535) -46.336,-10.535 -46.336,-13.071 ccw(c-44.304,-13.071) -44.304,-15.103 -41.768,-15.103 ccw(c-41.768,-13.071)
  pour cut-out: -55.436,-13.071 -55.436,-10.535 ccw(c-57.468,-10.535) -57.468,-8.503 -60.004,-8.503 ccw(c-60.004,-10.535) -62.036,-10.535 -62.036,-13.071 ccw(c-60.004,-13.071) -60.004,-15.103 -57.468,-15.103 ccw(c-57.468,-13.071)
  pour cut-out: -69.886,-13.071 -69.886,-10.535 cw(c-67.854,-10.535) -67.854,-8.503 -65.318,-8.503 cw(c-65.318,-10.535) -63.286,-10.535 -63.286,-13.071 cw(c-65.318,-13.071) -65.318,-15.103 -67.854,-15.103 cw(c-67.854,-13.071)
  pour cut-out: -38.486,-13.071 -38.486,-10.535 cw(c-36.454,-10.535) -36.454,-8.503 -33.918,-8.503 cw(c-33.918,-10.535) -31.886,-10.535 -31.886,-13.071 cw(c-33.918,-13.071) -33.918,-15.103 -36.454,-15.103 cw(c-36.454,-13.071)
  pour cut-out: -38.486,2.629 -38.486,5.165 cw(c-36.454,5.165) -36.454,7.197 -33.918,7.197 cw(c-33.918,5.165) -31.886,5.165 -31.886,2.629 cw(c-33.918,2.629) -33.918,0.597 -36.454,0.597 cw(c-36.454,2.629)
  pour cut-out: -31.886,10.479 -31.886,13.015 ccw(c-33.918,13.015) -33.918,15.047 -36.454,15.047 ccw(c-36.454,13.015) -38.486,13.015 -38.486,10.479 ccw(c-36.454,10.479) -36.454,8.447 -33.918,8.447 ccw(c-33.918,10.479)
  pour cut-out: -31.886,-5.221 -31.886,-2.685 ccw(c-33.918,-2.685) -33.918,-0.653 -36.454,-0.653 ccw(c-36.454,-2.685) -38.486,-2.685 -38.486,-5.221 ccw(c-36.454,-5.221) -36.454,-7.253 -33.918,-7.253 ccw(c-33.918,-5.221)
  pour cut-out: -54.186,2.629 -54.186,5.165 cw(c-52.154,5.165) -52.154,7.197 -49.618,7.197 cw(c-49.618,5.165) -47.586,5.165 -47.586,2.629 cw(c-49.618,2.629) -49.618,0.597 -52.154,0.597 cw(c-52.154,2.629)
  pour cut-out: -39.736,2.629 -39.736,5.165 ccw(c-41.768,5.165) -41.768,7.197 -44.304,7.197 ccw(c-44.304,5.165) -46.336,5.165 -46.336,2.629 ccw(c-44.304,2.629) -44.304,0.597 -41.768,0.597 ccw(c-41.768,2.629)
  pour cut-out: -55.436,2.629 -55.436,5.165 ccw(c-57.468,5.165) -57.468,7.197 -60.004,7.197 ccw(c-60.004,5.165) -62.036,5.165 -62.036,2.629 ccw(c-60.004,2.629) -60.004,0.597 -57.468,0.597 ccw(c-57.468,2.629)
  pour cut-out: -47.586,-5.221 -47.586,-2.685 ccw(c-49.618,-2.685) -49.618,-0.653 -52.154,-0.653 ccw(c-52.154,-2.685) -54.186,-2.685 -54.186,-5.221 ccw(c-52.154,-5.221) -52.154,-7.253 -49.618,-7.253 ccw(c-49.618,-5.221)
  pour cut-out: -24.036,2.629 -24.036,5.165 ccw(c-26.068,5.165) -26.068,7.197 -28.604,7.197 ccw(c-28.604,5.165) -30.636,5.165 -30.636,2.629 ccw(c-28.604,2.629) -28.604,0.597 -26.068,0.597 ccw(c-26.068,2.629)
  pour cut-out: -60,27.562 cw(c-60,36.562) -69,36.562 cw(c-60,36.562) -60,45.562 cw(c-60,36.562) -51,36.562 cw(c-60,36.562)
  pour cut-out: -69,-36.561 ccw(c-60,-36.561) -60,-45.561 ccw(c-60,-36.561) -51,-36.561 ccw(c-60,-36.561) -60,-27.561 ccw(c-60,-36.561)
Bottom Layer:
  pour cut-out: -66.586,10.147 cw(c-66.586,11.747) -68.186,11.747 cw(c-66.586,11.747) -66.586,13.347 cw(c-66.586,11.747) -64.986,11.747 cw(c-66.586,11.747)
  pour cut-out: -58.736,10.147 cw(c-58.736,11.747) -60.336,11.747 cw(c-58.736,11.747) -58.736,13.347 cw(c-58.736,11.747) -57.136,11.747 cw(c-58.736,11.747)
  pour cut-out: -50.886,10.147 cw(c-50.886,11.747) -52.486,11.747 cw(c-50.886,11.747) -50.886,13.347 cw(c-50.886,11.747) -49.286,11.747 cw(c-50.886,11.747)
  pour cut-out: -43.036,10.147 cw(c-43.036,11.747) -44.636,11.747 cw(c-43.036,11.747) -43.036,13.347 cw(c-43.036,11.747) -41.436,11.747 cw(c-43.036,11.747)
  pour cut-out: -35.186,10.147 cw(c-35.186,11.747) -36.786,11.747 cw(c-35.186,11.747) -35.186,13.347 cw(c-35.186,11.747) -33.586,11.747 cw(c-35.186,11.747)
  pour cut-out: -27.336,10.147 cw(c-27.336,11.747) -28.936,11.747 cw(c-27.336,11.747) -27.336,13.347 cw(c-27.336,11.747) -25.736,11.747 cw(c-27.336,11.747)
  pour cut-out: -27.336,2.297 cw(c-27.336,3.897) -28.936,3.897 cw(c-27.336,3.897) -27.336,5.497 cw(c-27.336,3.897) -25.736,3.897 cw(c-27.336,3.897)
  pour cut-out: -35.186,2.297 cw(c-35.186,3.897) -36.786,3.897 cw(c-35.186,3.897) -35.186,5.497 cw(c-35.186,3.897) -33.586,3.897 cw(c-35.186,3.897)
  pour cut-out: -43.036,2.297 cw(c-43.036,3.897) -44.636,3.897 cw(c-43.036,3.897) -43.036,5.497 cw(c-43.036,3.897) -41.436,3.897 cw(c-43.036,3.897)
  pour cut-out: -50.886,2.297 cw(c-50.886,3.897) -52.486,3.897 cw(c-50.886,3.897) -50.886,5.497 cw(c-50.886,3.897) -49.286,3.897 cw(c-50.886,3.897)
  pour cut-out: -58.736,2.297 cw(c-58.736,3.897) -60.336,3.897 cw(c-58.736,3.897) -58.736,5.497 cw(c-58.736,3.897) -57.136,3.897 cw(c-58.736,3.897)
  pour cut-out: -58.736,-5.553 cw(c-58.736,-3.953) -60.336,-3.953 cw(c-58.736,-3.953) -58.736,-2.353 cw(c-58.736,-3.953) -57.136,-3.953 cw(c-58.736,-3.953)
  pour cut-out: -50.886,-5.553 cw(c-50.886,-3.953) -52.486,-3.953 cw(c-50.886,-3.953) -50.886,-2.353 cw(c-50.886,-3.953) -49.286,-3.953 cw(c-50.886,-3.953)
  pour cut-out: -43.036,-5.553 cw(c-43.036,-3.953) -44.636,-3.953 cw(c-43.036,-3.953) -43.036,-2.353 cw(c-43.036,-3.953) -41.436,-3.953 cw(c-43.036,-3.953)
  pour cut-out: -35.186,-5.553 cw(c-35.186,-3.953) -36.786,-3.953 cw(c-35.186,-3.953) -35.186,-2.353 cw(c-35.186,-3.953) -33.586,-3.953 cw(c-35.186,-3.953)
  pour cut-out: -35.186,-13.403 cw(c-35.186,-11.803) -36.786,-11.803 cw(c-35.186,-11.803) -35.186,-10.203 cw(c-35.186,-11.803) -33.586,-11.803 cw(c-35.186,-11.803)
  pour cut-out: -43.036,-13.403 cw(c-43.036,-11.803) -44.636,-11.803 cw(c-43.036,-11.803) -43.036,-10.203 cw(c-43.036,-11.803) -41.436,-11.803 cw(c-43.036,-11.803)
  pour cut-out: -50.886,-13.403 cw(c-50.886,-11.803) -52.486,-11.803 cw(c-50.886,-11.803) -50.886,-10.203 cw(c-50.886,-11.803) -49.286,-11.803 cw(c-50.886,-11.803)
  pour cut-out: -58.736,-13.403 cw(c-58.736,-11.803) -60.336,-11.803 cw(c-58.736,-11.803) -58.736,-10.203 cw(c-58.736,-11.803) -57.136,-11.803 cw(c-58.736,-11.803)
  pour cut-out: -66.586,-13.403 cw(c-66.586,-11.803) -68.186,-11.803 cw(c-66.586,-11.803) -66.586,-10.203 cw(c-66.586,-11.803) -64.986,-11.803 cw(c-66.586,-11.803)
  pour cut-out: -60,27.562 cw(c-60,36.562) -69,36.562 cw(c-60,36.562) -60,45.562 cw(c-60,36.562) -51,36.562 cw(c-60,36.562)
  pour cut-out: -69,-36.561 ccw(c-60,-36.561) -60,-45.561 ccw(c-60,-36.561) -51,-36.561 ccw(c-60,-36.561) -60,-27.561 ccw(c-60,-36.561)
Mid Layer 1 (plane layer: these items are gaps in the copper):
  region: -38.486,-13.071 -38.486,-10.535 cw(c-36.454,-10.535) -36.454,-8.503 -33.918,-8.503 cw(c-33.918,-10.535) -31.886,-10.535 -31.886,-13.071 cw(c-33.918,-13.071) -33.918,-15.103 -36.454,-15.103 cw(c-36.454,-13.071)
  region: -54.186,-13.071 -54.186,-10.535 cw(c-52.154,-10.535) -52.154,-8.503 -49.618,-8.503 cw(c-49.618,-10.535) -47.586,-10.535 -47.586,-13.071 cw(c-49.618,-13.071) -49.618,-15.103 -52.154,-15.103 cw(c-52.154,-13.071)
  region: -46.336,-5.221 -46.336,-2.685 cw(c-44.304,-2.685) -44.304,-0.653 -41.768,-0.653 cw(c-41.768,-2.685) -39.736,-2.685 -39.736,-5.221 cw(c-41.768,-5.221) -41.768,-7.253 -44.304,-7.253 cw(c-44.304,-5.221)
  region: -62.036,-5.221 -62.036,-2.685 cw(c-60.004,-2.685) -60.004,-0.653 -57.468,-0.653 cw(c-57.468,-2.685) -55.436,-2.685 -55.436,-5.221 cw(c-57.468,-5.221) -57.468,-7.253 -60.004,-7.253 cw(c-60.004,-5.221)
  region: -54.186,2.629 -54.186,5.165 cw(c-52.154,5.165) -52.154,7.197 -49.618,7.197 cw(c-49.618,5.165) -47.586,5.165 -47.586,2.629 cw(c-49.618,2.629) -49.618,0.597 -52.154,0.597 cw(c-52.154,2.629)
  region: -38.486,2.629 -38.486,5.165 cw(c-36.454,5.165) -36.454,7.197 -33.918,7.197 cw(c-33.918,5.165) -31.886,5.165 -31.886,2.629 cw(c-33.918,2.629) -33.918,0.597 -36.454,0.597 cw(c-36.454,2.629)
  region: -30.636,10.479 -30.636,13.015 cw(c-28.604,13.015) -28.604,15.047 -26.068,15.047 cw(c-26.068,13.015) -24.036,13.015 -24.036,10.479 cw(c-26.068,10.479) -26.068,8.447 -28.604,8.447 cw(c-28.604,10.479)
  region: -46.336,10.479 -46.336,13.015 cw(c-44.304,13.015) -44.304,15.047 -41.768,15.047 cw(c-41.768,13.015) -39.736,13.015 -39.736,10.479 cw(c-41.768,10.479) -41.768,8.447 -44.304,8.447 cw(c-44.304,10.479)
  region: -62.036,10.479 -62.036,13.015 cw(c-60.004,13.015) -60.004,15.047 -57.468,15.047 cw(c-57.468,13.015) -55.436,13.015 -55.436,10.479 cw(c-57.468,10.479) -57.468,8.447 -60.004,8.447 cw(c-60.004,10.479)
  region: -63.286,10.479 -63.286,13.015 ccw(c-65.318,13.015) -65.318,15.047 -67.854,15.047 ccw(c-67.854,13.015) -69.886,13.015 -69.886,10.479 ccw(c-67.854,10.479) -67.854,8.447 -65.318,8.447 ccw(c-65.318,10.479)
  region: -47.586,10.479 -47.586,13.015 ccw(c-49.618,13.015) -49.618,15.047 -52.154,15.047 ccw(c-52.154,13.015) -54.186,13.015 -54.186,10.479 ccw(c-52.154,10.479) -52.154,8.447 -49.618,8.447 ccw(c-49.618,10.479)
  region: -31.886,10.479 -31.886,13.015 ccw(c-33.918,13.015) -33.918,15.047 -36.454,15.047 ccw(c-36.454,13.015) -38.486,13.015 -38.486,10.479 ccw(c-36.454,10.479) -36.454,8.447 -33.918,8.447 ccw(c-33.918,10.479)
  region: -24.036,2.629 -24.036,5.165 ccw(c-26.068,5.165) -26.068,7.197 -28.604,7.197 ccw(c-28.604,5.165) -30.636,5.165 -30.636,2.629 ccw(c-28.604,2.629) -28.604,0.597 -26.068,0.597 ccw(c-26.068,2.629)
  region: -39.736,2.629 -39.736,5.165 ccw(c-41.768,5.165) -41.768,7.197 -44.304,7.197 ccw(c-44.304,5.165) -46.336,5.165 -46.336,2.629 ccw(c-44.304,2.629) -44.304,0.597 -41.768,0.597 ccw(c-41.768,2.629)
  region: -55.436,2.629 -55.436,5.165 ccw(c-57.468,5.165) -57.468,7.197 -60.004,7.197 ccw(c-60.004,5.165) -62.036,5.165 -62.036,2.629 ccw(c-60.004,2.629) -60.004,0.597 -57.468,0.597 ccw(c-57.468,2.629)
  region: -47.586,-5.221 -47.586,-2.685 ccw(c-49.618,-2.685) -49.618,-0.653 -52.154,-0.653 ccw(c-52.154,-2.685) -54.186,-2.685 -54.186,-5.221 ccw(c-52.154,-5.221) -52.154,-7.253 -49.618,-7.253 ccw(c-49.618,-5.221)
  region: -31.886,-5.221 -31.886,-2.685 ccw(c-33.918,-2.685) -33.918,-0.653 -36.454,-0.653 ccw(c-36.454,-2.685) -38.486,-2.685 -38.486,-5.221 ccw(c-36.454,-5.221) -36.454,-7.253 -33.918,-7.253 ccw(c-33.918,-5.221)
  region: -39.736,-13.071 -39.736,-10.535 ccw(c-41.768,-10.535) -41.768,-8.503 -44.304,-8.503 ccw(c-44.304,-10.535) -46.336,-10.535 -46.336,-13.071 ccw(c-44.304,-13.071) -44.304,-15.103 -41.768,-15.103 ccw(c-41.768,-13.071)
  region: -55.436,-13.071 -55.436,-10.535 ccw(c-57.468,-10.535) -57.468,-8.503 -60.004,-8.503 ccw(c-60.004,-10.535) -62.036,-10.535 -62.036,-13.071 ccw(c-60.004,-13.071) -60.004,-15.103 -57.468,-15.103 ccw(c-57.468,-13.071)
  region: -69.886,-13.071 -69.886,-10.535 cw(c-67.854,-10.535) -67.854,-8.503 -65.318,-8.503 cw(c-65.318,-10.535) -63.286,-10.535 -63.286,-13.071 cw(c-65.318,-13.071) -65.318,-15.103 -67.854,-15.103 cw(c-67.854,-13.071)
Mid Layer 2 (plane layer: these items are gaps in the copper):
  region: -38.486,-13.071 -38.486,-10.535 cw(c-36.454,-10.535) -36.454,-8.503 -33.918,-8.503 cw(c-33.918,-10.535) -31.886,-10.535 -31.886,-13.071 cw(c-33.918,-13.071) -33.918,-15.103 -36.454,-15.103 cw(c-36.454,-13.071)
  region: -54.186,-13.071 -54.186,-10.535 cw(c-52.154,-10.535) -52.154,-8.503 -49.618,-8.503 cw(c-49.618,-10.535) -47.586,-10.535 -47.586,-13.071 cw(c-49.618,-13.071) -49.618,-15.103 -52.154,-15.103 cw(c-52.154,-13.071)
  region: -46.336,-5.221 -46.336,-2.685 cw(c-44.304,-2.685) -44.304,-0.653 -41.768,-0.653 cw(c-41.768,-2.685) -39.736,-2.685 -39.736,-5.221 cw(c-41.768,-5.221) -41.768,-7.253 -44.304,-7.253 cw(c-44.304,-5.221)
  region: -62.036,-5.221 -62.036,-2.685 cw(c-60.004,-2.685) -60.004,-0.653 -57.468,-0.653 cw(c-57.468,-2.685) -55.436,-2.685 -55.436,-5.221 cw(c-57.468,-5.221) -57.468,-7.253 -60.004,-7.253 cw(c-60.004,-5.221)
  region: -54.186,2.629 -54.186,5.165 cw(c-52.154,5.165) -52.154,7.197 -49.618,7.197 cw(c-49.618,5.165) -47.586,5.165 -47.586,2.629 cw(c-49.618,2.629) -49.618,0.597 -52.154,0.597 cw(c-52.154,2.629)
  region: -38.486,2.629 -38.486,5.165 cw(c-36.454,5.165) -36.454,7.197 -33.918,7.197 cw(c-33.918,5.165) -31.886,5.165 -31.886,2.629 cw(c-33.918,2.629) -33.918,0.597 -36.454,0.597 cw(c-36.454,2.629)
  region: -30.636,10.479 -30.636,13.015 cw(c-28.604,13.015) -28.604,15.047 -26.068,15.047 cw(c-26.068,13.015) -24.036,13.015 -24.036,10.479 cw(c-26.068,10.479) -26.068,8.447 -28.604,8.447 cw(c-28.604,10.479)
  region: -46.336,10.479 -46.336,13.015 cw(c-44.304,13.015) -44.304,15.047 -41.768,15.047 cw(c-41.768,13.015) -39.736,13.015 -39.736,10.479 cw(c-41.768,10.479) -41.768,8.447 -44.304,8.447 cw(c-44.304,10.479)
  region: -62.036,10.479 -62.036,13.015 cw(c-60.004,13.015) -60.004,15.047 -57.468,15.047 cw(c-57.468,13.015) -55.436,13.015 -55.436,10.479 cw(c-57.468,10.479) -57.468,8.447 -60.004,8.447 cw(c-60.004,10.479)
  region: -63.286,10.479 -63.286,13.015 ccw(c-65.318,13.015) -65.318,15.047 -67.854,15.047 ccw(c-67.854,13.015) -69.886,13.015 -69.886,10.479 ccw(c-67.854,10.479) -67.854,8.447 -65.318,8.447 ccw(c-65.318,10.479)
  region: -47.586,10.479 -47.586,13.015 ccw(c-49.618,13.015) -49.618,15.047 -52.154,15.047 ccw(c-52.154,13.015) -54.186,13.015 -54.186,10.479 ccw(c-52.154,10.479) -52.154,8.447 -49.618,8.447 ccw(c-49.618,10.479)
  region: -31.886,10.479 -31.886,13.015 ccw(c-33.918,13.015) -33.918,15.047 -36.454,15.047 ccw(c-36.454,13.015) -38.486,13.015 -38.486,10.479 ccw(c-36.454,10.479) -36.454,8.447 -33.918,8.447 ccw(c-33.918,10.479)
  region: -24.036,2.629 -24.036,5.165 ccw(c-26.068,5.165) -26.068,7.197 -28.604,7.197 ccw(c-28.604,5.165) -30.636,5.165 -30.636,2.629 ccw(c-28.604,2.629) -28.604,0.597 -26.068,0.597 ccw(c-26.068,2.629)
  region: -39.736,2.629 -39.736,5.165 ccw(c-41.768,5.165) -41.768,7.197 -44.304,7.197 ccw(c-44.304,5.165) -46.336,5.165 -46.336,2.629 ccw(c-44.304,2.629) -44.304,0.597 -41.768,0.597 ccw(c-41.768,2.629)
  region: -55.436,2.629 -55.436,5.165 ccw(c-57.468,5.165) -57.468,7.197 -60.004,7.197 ccw(c-60.004,5.165) -62.036,5.165 -62.036,2.629 ccw(c-60.004,2.629) -60.004,0.597 -57.468,0.597 ccw(c-57.468,2.629)
  region: -47.586,-5.221 -47.586,-2.685 ccw(c-49.618,-2.685) -49.618,-0.653 -52.154,-0.653 ccw(c-52.154,-2.685) -54.186,-2.685 -54.186,-5.221 ccw(c-52.154,-5.221) -52.154,-7.253 -49.618,-7.253 ccw(c-49.618,-5.221)
  region: -31.886,-5.221 -31.886,-2.685 ccw(c-33.918,-2.685) -33.918,-0.653 -36.454,-0.653 ccw(c-36.454,-2.685) -38.486,-2.685 -38.486,-5.221 ccw(c-36.454,-5.221) -36.454,-7.253 -33.918,-7.253 ccw(c-33.918,-5.221)
  region: -39.736,-13.071 -39.736,-10.535 ccw(c-41.768,-10.535) -41.768,-8.503 -44.304,-8.503 ccw(c-44.304,-10.535) -46.336,-10.535 -46.336,-13.071 ccw(c-44.304,-13.071) -44.304,-15.103 -41.768,-15.103 ccw(c-41.768,-13.071)
  region: -55.436,-13.071 -55.436,-10.535 ccw(c-57.468,-10.535) -57.468,-8.503 -60.004,-8.503 ccw(c-60.004,-10.535) -62.036,-10.535 -62.036,-13.071 ccw(c-60.004,-13.071) -60.004,-15.103 -57.468,-15.103 ccw(c-57.468,-13.071)
  region: -69.886,-13.071 -69.886,-10.535 cw(c-67.854,-10.535) -67.854,-8.503 -65.318,-8.503 cw(c-65.318,-10.535) -63.286,-10.535 -63.286,-13.071 cw(c-65.318,-13.071) -65.318,-15.103 -67.854,-15.103 cw(c-67.854,-13.071)

## Silkscreen, mask and mechanical layers (free items; w line width, h text height)
Top Overlay:
  circle w0.254: c-66.675,-0.014 r2.413
  lines w0.254: -67.735,0.425 -66.675,1.486 ; -66.675,-1.514 -66.675,1.486 ; -65.614,0.425 -66.675,1.486
  text "POWER" at -40,-30.527 h0.76
  text "LED / MODULE" at -39.677,-46.561 h1.52
Bottom Overlay:
  text "02" at -43.359,39.513 h0.76
  text "01" at -32.072,39.513 h0.76
  text "20" at -43.359,16.653 h0.76
  text "19" at -31.945,16.653 h0.76
  text "02" at -43.359,-17.415 h0.76
  text "01" at -32.072,-17.415 h0.76
  text "20" at -43.359,-40.275 h0.76
  text "19" at -31.945,-40.275 h0.76
Top Solder:
  drawing of 20 lines, arcs and shapes, not listed
Bottom Solder:
  region: -58.736,-5.553 ccw(c-58.736,-3.953) -57.136,-3.953 ccw(c-58.736,-3.953) -58.736,-2.353 ccw(c-58.736,-3.953) -60.336,-3.953 ccw(c-58.736,-3.953)
  region: -35.186,2.297 ccw(c-35.186,3.897) -33.586,3.897 ccw(c-35.186,3.897) -35.186,5.497 ccw(c-35.186,3.897) -36.786,3.897 ccw(c-35.186,3.897)
  region: -27.336,10.147 ccw(c-27.336,11.747) -25.736,11.747 ccw(c-27.336,11.747) -27.336,13.347 ccw(c-27.336,11.747) -28.936,11.747 ccw(c-27.336,11.747)
  region: -35.186,-5.553 cw(c-35.186,-3.953) -36.786,-3.953 cw(c-35.186,-3.953) -35.186,-2.353 cw(c-35.186,-3.953) -33.586,-3.953 cw(c-35.186,-3.953)
  region: -27.336,2.297 cw(c-27.336,3.897) -28.936,3.897 cw(c-27.336,3.897) -27.336,5.497 cw(c-27.336,3.897) -25.736,3.897 cw(c-27.336,3.897)
  region: -35.186,10.147 cw(c-35.186,11.747) -36.786,11.747 cw(c-35.186,11.747) -35.186,13.347 cw(c-35.186,11.747) -33.586,11.747 cw(c-35.186,11.747)
  region: -66.586,-13.403 ccw(c-66.586,-11.803) -64.986,-11.803 ccw(c-66.586,-11.803) -66.586,-10.203 ccw(c-66.586,-11.803) -68.186,-11.803 ccw(c-66.586,-11.803)
  region: -66.586,10.147 cw(c-66.586,11.747) -68.186,11.747 cw(c-66.586,11.747) -66.586,13.347 cw(c-66.586,11.747) -64.986,11.747 cw(c-66.586,11.747)
  region: -43.036,-5.553 ccw(c-43.036,-3.953) -41.436,-3.953 ccw(c-43.036,-3.953) -43.036,-2.353 ccw(c-43.036,-3.953) -44.636,-3.953 ccw(c-43.036,-3.953)
  region: -50.886,2.297 ccw(c-50.886,3.897) -49.286,3.897 ccw(c-50.886,3.897) -50.886,5.497 ccw(c-50.886,3.897) -52.486,3.897 ccw(c-50.886,3.897)
  region: -50.886,-5.553 cw(c-50.886,-3.953) -52.486,-3.953 cw(c-50.886,-3.953) -50.886,-2.353 cw(c-50.886,-3.953) -49.286,-3.953 cw(c-50.886,-3.953)
  region: -43.036,2.297 cw(c-43.036,3.897) -44.636,3.897 cw(c-43.036,3.897) -43.036,5.497 cw(c-43.036,3.897) -41.436,3.897 cw(c-43.036,3.897)
  region: -58.736,2.297 cw(c-58.736,3.897) -60.336,3.897 cw(c-58.736,3.897) -58.736,5.497 cw(c-58.736,3.897) -57.136,3.897 cw(c-58.736,3.897)
  region: -50.886,-13.403 ccw(c-50.886,-11.803) -49.286,-11.803 ccw(c-50.886,-11.803) -50.886,-10.203 ccw(c-50.886,-11.803) -52.486,-11.803 ccw(c-50.886,-11.803)
  region: -35.186,-13.403 ccw(c-35.186,-11.803) -33.586,-11.803 ccw(c-35.186,-11.803) -35.186,-10.203 ccw(c-35.186,-11.803) -36.786,-11.803 ccw(c-35.186,-11.803)
  region: -58.736,-13.403 cw(c-58.736,-11.803) -60.336,-11.803 cw(c-58.736,-11.803) -58.736,-10.203 cw(c-58.736,-11.803) -57.136,-11.803 cw(c-58.736,-11.803)
  region: -43.036,-13.403 cw(c-43.036,-11.803) -44.636,-11.803 cw(c-43.036,-11.803) -43.036,-10.203 cw(c-43.036,-11.803) -41.436,-11.803 cw(c-43.036,-11.803)
  region: -43.036,10.147 ccw(c-43.036,11.747) -41.436,11.747 ccw(c-43.036,11.747) -43.036,13.347 ccw(c-43.036,11.747) -44.636,11.747 ccw(c-43.036,11.747)
  region: -58.736,10.147 ccw(c-58.736,11.747) -57.136,11.747 ccw(c-58.736,11.747) -58.736,13.347 ccw(c-58.736,11.747) -60.336,11.747 ccw(c-58.736,11.747)
  region: -50.886,10.147 cw(c-50.886,11.747) -52.486,11.747 cw(c-50.886,11.747) -50.886,13.347 cw(c-50.886,11.747) -49.286,11.747 cw(c-50.886,11.747)
Mechanical 1:
  drawing of 160 lines, arcs and shapes, not listed
Mechanical 3:
  circle w0.102: c-66.586,-11.803 r1.6
  circle w0.102: c-50.886,-11.803 r1.6
  circle w0.102: c-58.736,-3.953 r1.6
  circle w0.102: c-50.886,3.897 r1.6
  circle w0.102: c-43.036,11.747 r1.6
  circle w0.102: c-58.736,11.747 r1.6
  circle w0.102: c-58.736,-11.803 r1.6
  circle w0.102: c-50.886,-3.953 r1.6
  circle w0.102: c-58.736,3.897 r1.6
  circle w0.102: c-43.036,3.897 r1.6
  circle w0.102: c-50.886,11.747 r1.6
  circle w0.102: c-35.186,3.897 r1.6
  circle w0.102: c-27.336,11.747 r1.6
  circle w0.102: c-43.036,-11.803 r1.6
  circle w0.102: c-35.186,-3.953 r1.6
  circle w0.102: c-27.336,3.897 r1.6
  circle w0.102: c-35.186,11.747 r1.6
  circle w0.102: c-35.186,-11.803 r1.6
  circle w0.102: c-43.036,-3.953 r1.6
  circle w0.102: c-66.586,11.747 r1.6
  circle w0.127: c0,0 r0.064
  lines w0.254: -72,-36.558 ccw(c-60,-36.558) -60,-48.558 -13.043,-48.558 ccw(c-13.043,-47.288) -11.773,-47.288 -11.773,-29.331 cw(c-10.503,-29.331) -10.503,-28.061 5.397,-28.061 cw(c5.397,-29.331) 6.667,-29.331 6.667,-47.288 ccw(c7.937,-47.288) 7.937,-48.558 25.4,-48.558 60,-48.558 ccw(c60,-36.558) 72,-36.558 72,36.565 ccw(c60,36.565) 60,48.565 -60,48.565 ccw(c-60,36.565) -72,36.565 -72,-36.558
Mechanical 5:
  circle w0.254: c-60,36.562 r9
  circle w0.254: c-60,-36.561 r9
  circle w0.127: c0,0 r0.064
  circle w0.254: c60,-36.561 r3.3
  circle w0.254: c60,-36.561 r12
  circle w0.254: c46.961,0 r14.375
  circle w0.254: c60,36.561 r3.3
  circle w0.254: c60,36.561 r12
  circle w0.254: c-60,36.561 r12